# Altium PCB PCB1.PcbDoc
Units mm, origin at the board's own origin, x right, y up, seen from the top; angles counter-clockwise.
Board outline 44 x 44 mm, 2 copper layers (Top Layer, Bottom Layer); 46 components, 92 nets, 214 pads, 0 vias.
Unrouted connection lines stored in the file: 102.
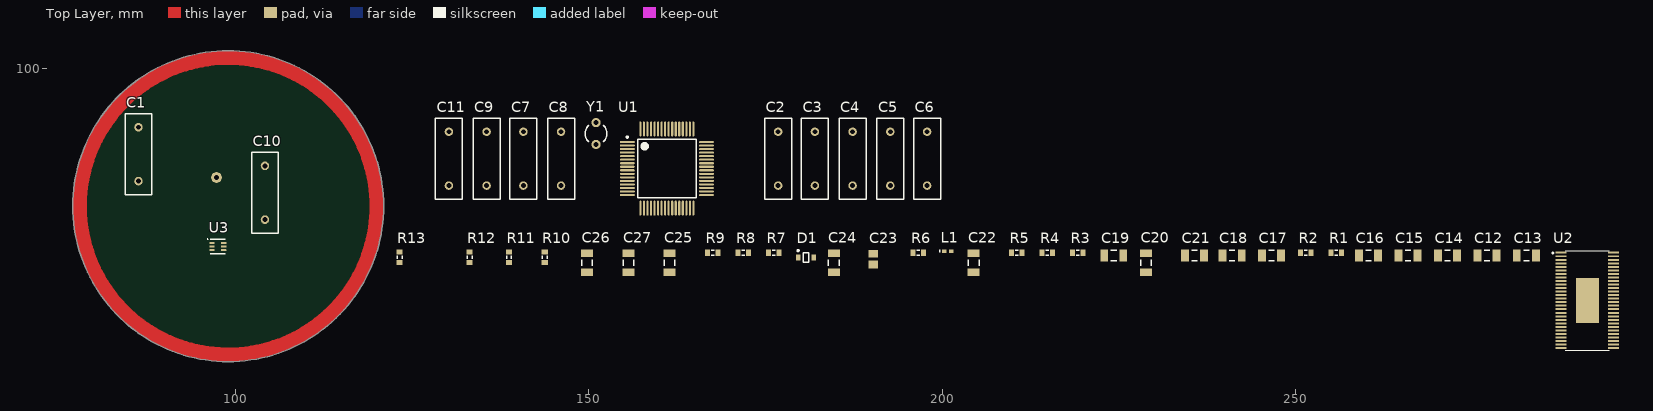
[diagram p0: Top Layer view]
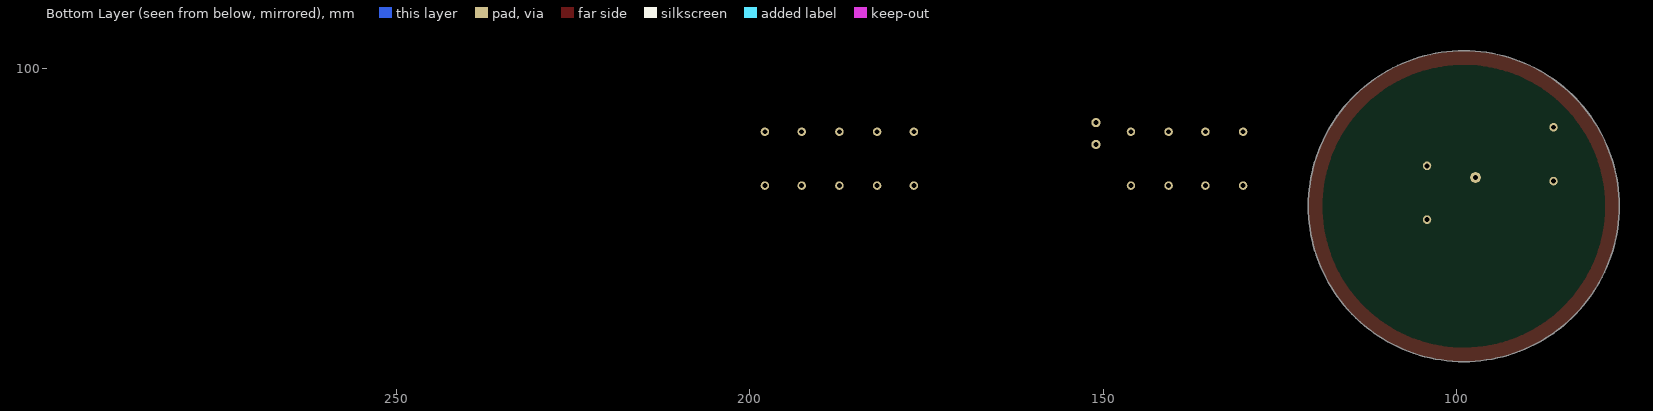
[diagram p1: Bottom Layer view, seen from below]

## Layer stack, top to bottom
Top Solder: solder mask 0.0102, Solder Resist, Dk 3.5
Top Layer: signal copper 0.0356
Dielectric 1: dielectric 0.32, FR-4, Dk 4.8
Bottom Layer: signal copper 0.0356
Bottom Solder: solder mask 0.0102, Solder Resist, Dk 3.5

## Board outline
76.933,80.518 ccw(c98.933,80.518) 98.933,58.518 ccw(c98.933,80.518) 120.933,80.518 ccw(c98.933,80.518) 98.933,102.518 ccw(c98.933,80.518)

## Design rules (kind name [scope] priority, off if disabled: settings)
Clearance [All] p1: gap=0.254 ignorepadtopadclearanceinfootprint=FALSE except(0: Arc-Hole Track-Hole SMDPad-Hole THPad-Hole Via-Hole Fill-Hole Poly-Hole Region-Hole Text-Hole)
PolygonConnect [All] p1: connectstyle=Relief reliefconductorwidth=0.254 reliefentries=4 polygonreliefangle="90 Angle" airgapwidth=0.254
RoomDefinition U_MCU [InComponentClass('U_MCU')] p1: confinementstyle=ConfineIn formatcopy=TRUE lockcomponents=FALSE outline 122.428,78.486 200.025,78.486 200.025,95.885 122.428,95.885
RoomDefinition U_DRV8301 [InComponentClass('U_DRV8301')] p2: confinementstyle=ConfineIn formatcopy=TRUE lockcomponents=FALSE outline 122.428,59.69 296.291,59.69 296.291,77.343 122.428,77.343
RoutingVias [All] p1: holewidth=0.711 width=1.27 viastyle="Through Hole" minholewidth=0.711 minwidth=1.27 maxholewidth=0.711 maxwidth=1.27
SolderMaskExpansion [All] p1: expansion=0.102 istentingtop=FALSE
Width [All] p1: maxlimit=0.254 minlimit=0.254 preferedwidth=0.254
30 further rules are at their usual default settings.

## Classes and differential pairs
component class U_MCU: C1 C2 C3 C4 C5 C6 C7 C8 C9 C10 C11 U1 Y1
component class U_DRV8301: C12 C13 C14 C15 C16 C17 C18 C19 C20 C21 C22 C23 C24 C25 C26 C27 D1 L1 R1 R2 R3 R4 R5 R6 R7 R8 R9 R10 R11 R12 R13 U2 U3

## Components (designator, comment, footprint, x,y, rotation, side; value= is the part's Value field where it differs from the comment)
C1 "Cap" RAD-0.3 86.233,87.884 r90 top value=2.2uF
C2 "Cap" RAD-0.3 176.784,87.249 r90 top value=2.2uF
C3 "Cap" RAD-0.3 181.991,87.249 r90 top value=2.2uF
C4 "Cap" RAD-0.3 187.325,87.249 r90 top value=2.2uF
C5 "Cap" RAD-0.3 192.659,87.249 r90 top value=2.2uF
C6 "Cap" RAD-0.3 197.866,87.249 r90 top value=2.2uF
C7 "Cap" RAD-0.3 140.716,87.249 r90 top value=15pF
C8 "Cap" RAD-0.3 146.05,87.249 r90 top value=15pF
C9 "Cap" RAD-0.3 135.509,87.249 r90 top value=100nF
C10 "Cap" RAD-0.3 104.14,82.423 r90 top value=2.2uF
C11 "Cap" RAD-0.3 130.175,87.249 r90 top value=2.2uF
C12 "Cap Semi" C1206 277.114,73.533 r0 top value=2.2uF
C13 "Cap Semi" C1206 282.702,73.533 r0 top value=2.2uF
C14 "Cap Semi" C1206 271.526,73.533 r0 top value=2.2uF
C15 "Cap Semi" C1206 265.938,73.533 r0 top value=2.2uF
C16 "Cap Semi" C1206 260.35,73.533 r0 top value=6.8nF
C17 "Cap Semi" C1206 246.634,73.533 r0 top value=22nF
C18 "Cap Semi" C1206 241.046,73.533 r0 top value=120pF
C19 "Cap Semi" C1206 224.282,73.533 r0 top value=220nF
C20 "Cap Semi" C1206 228.854,72.517 r90 top value=220nF
C21 "Cap Semi" C1206 235.712,73.533 r0 top value=220nF
C22 "Cap Semi" C1206 204.47,72.517 r90 top value=100nF
C23 "Cap Pol3" C0805 190.246,73.025 r90 top value=100uF
C24 "Cap Semi" C1206 184.658,72.517 r90 top value=2.2uF
C25 "Cap Semi" C1206 161.417,72.517 r90 top value=15nF
C26 "Cap Semi" C1206 149.733,72.517 r90 top value=4.7uF_100V
C27 "Cap Semi" C1206 155.575,72.517 r90 top value=4.7uF_100V
D1 "BAT54HT1G" ONSC-SOD-323-2-477-02_V 180.721,73.279 r0 top
L1 "Inductor" 0402-A 200.787,74.168 r0 top value=22u
R1 "Res3" J1-0603 255.778,73.914 r0 top value=3.3k
R2 "Res3" J1-0603 251.46,73.914 r0 top value=220k
R3 "Res3" J1-0603 219.202,73.914 r0 top value=15k
R4 "Res3" J1-0603 214.884,73.914 r0 top value=18k
R5 "Res3" J1-0603 210.566,73.914 r0 top value=10k
R6 "Res3" J1-0603 196.596,73.914 r0 top value=39k
R7 "Res3" J1-0603 176.149,73.914 r0 top value=2k2
R8 "Res3" J1-0603 171.831,73.914 r0 top value=39k
R9 "Res3" J1-0603 167.513,73.914 r0 top value=2k2
R10 "Res3" J1-0603 143.764,73.279 r90 top value=39k
R11 "Res3" J1-0603 138.684,73.279 r90 top value=2k2
R12 "Res3" J1-0603 133.096,73.279 r90 top value=39k
R13 "Res3" J1-0603 123.19,73.279 r90 top value=2k2
U1 "STM32F405RGT6" STM-LQFP64_M 161.036,85.852 r0 top
U2 "DRV8301DCAR" *SOP50P810X120-57N 291.338,67.183 r0 top
U3 "LM3671LC-1.2/NOPB" NKH0006B_V 97.472,74.803 r0 top
Y1 "XTAL" R38 151.003,90.805 r0 top

## Footprints (in the part's own frame and the unit in brackets; to place one, negate y for a bottom-side part, rotate by r counter-clockwise, add the part's x,y. Pads: shape width x height; smd on the part's side, far side on the other; paste and mask are expansions set on the pad)
0402-A [mm] "Chip Inductor, Body 1.0x0.5mm, IPC High Density"
  rect 0.6x0.5 smd: 1(-0.5,0) 2(0.5,0)
  silkscreen extent -1.1,-0.15 -1.1,0.15, body extent -0.55,-0.3 0.55,0.3, height 0.55
*SOP50P810X120-57N [mm]
  rect 1.57x0.28 smd: 1(-3.72,6.75) 2(-3.72,6.25) 3(-3.72,5.75) 4(-3.72,5.25) 5(-3.72,4.75) 6(-3.72,4.25) 7(-3.72,3.75) 8(-3.72,3.25) 9(-3.72,2.75) 10(-3.72,2.25) 11(-3.72,1.75) 12(-3.72,1.25) 13(-3.72,0.75) 14(-3.72,0.25) 15(-3.72,-0.25) 16(-3.72,-0.75) 17(-3.72,-1.25) 18(-3.72,-1.75) 19(-3.72,-2.25) 20(-3.72,-2.75) 21(-3.72,-3.25) 22(-3.72,-3.75) 23(-3.72,-4.25) 24(-3.72,-4.75) 25(-3.72,-5.25) 26(-3.72,-5.75) 27(-3.72,-6.25) 28(-3.72,-6.75) 29(3.72,-6.75) 30(3.72,-6.25) 31(3.72,-5.75) 32(3.72,-5.25) 33(3.72,-4.75) 34(3.72,-4.25) 35(3.72,-3.75) 36(3.72,-3.25) 37(3.72,-2.75) 38(3.72,-2.25) 39(3.72,-1.75) 40(3.72,-1.25) 41(3.72,-0.75) 42(3.72,-0.25) 43(3.72,0.25) 44(3.72,0.75) 45(3.72,1.25) 46(3.72,1.75) 47(3.72,2.25) 48(3.72,2.75) 49(3.72,3.25) 50(3.72,3.75) 51(3.72,4.25) 52(3.72,4.75) 53(3.72,5.25) 54(3.72,5.75) 55(3.72,6.25) 56(3.72,6.75)
  rect 3.235x6.35 smd: 57(0,0)
  silkscreen extent -4.99,-7.05 3.1,7.05
C0805 [mm] "Chip Capacitor, Body 2.0x1.3mm, IPC High Density"
  rect 1.1x1.4 smd: 1(-0.75,0) 2(0.75,0)
  body extent -1.1,-0.72 1.1,0.72, height 1.4
C1206 [mm] "Chip Capacitor, Body 3.2x1.6mm, IPC High Density"
  rect 1.1x1.7 smd: 1(-1.35,0) 2(1.35,0)
  silkscreen extent -0.4,-0.75 0.4,0.75, body extent -1.7,-0.9 1.7,0.9, height 1.3
J1-0603 [mm] "Chip Resistor, Body 1.6x0.8mm, IPC High Density"
  rect 0.7x0.9 smd: 1(-0.75,0) 2(0.75,0)
  silkscreen extent -0.2,-0.35 0.2,0.35, body extent -0.85,-0.48 0.85,0.48, height 0.9
NKH0006B_V [mm] "SON, 6-Leads, Body 2x2mm, Pitch 0.5mm, TI Recommend"
  rrect40% 0.75x0.25 smd: 1(-0.825,0.5) 2(-0.825,0) 3(-0.825,-0.5) 4(0.825,-0.5) 5(0.825,0) 6(0.825,0.5)
  silkscreen extent -1.5,-1.05 1.05,1.1, body extent -1,-1 1,1, height 0.59
ONSC-SOD-323-2-477-02_V [mm] "SOD, 2-Leads, Body 1.7x1.25mm"
  rect 0.63x0.83 smd: 1(-1.115,0) 2(1.115,0)
  silkscreen extent -1.24,-0.67 0.4,1.09, body extent -0.85,-0.63 0.85,0.63, height 1.06
R38 [mm] "Crystal, Thru-Hole; 2 Leads; Body 3.1 x 8.2 mm (Dia.xH)"
  round 1.3 hole 0.7: 1(0,1.55) 2(0,-1.55)
  silkscreen extent -1.55,-1.19 1.55,1.17
RAD-0.3 [mm] "Radial Cap, Thru-Hole; 2 Leads; 0.3 in Pin Spacing"
  round 1.2 hole 0.7: 1(-3.81,0) 2(3.81,0)
  silkscreen extent -5.71,-1.91 5.71,1.91
STM-LQFP64_M [mm] "Thin QFP, 64-Leads, Body 10x10mm, Pitch 0.5mm, IPC Low Density"
  oval 2.1x0.3 smd: 1(-5.6,3.75) 2(-5.6,3.25) 3(-5.6,2.75) 4(-5.6,2.25) 5(-5.6,1.75) 6(-5.6,1.25) 7(-5.6,0.75) 8(-5.6,0.25) 9(-5.6,-0.25) 10(-5.6,-0.75) 11(-5.6,-1.25) 12(-5.6,-1.75) 13(-5.6,-2.25) 14(-5.6,-2.75) 15(-5.6,-3.25) 16(-5.6,-3.75) 33(5.6,-3.75) 34(5.6,-3.25) 35(5.6,-2.75) 36(5.6,-2.25) 37(5.6,-1.75) 38(5.6,-1.25) 39(5.6,-0.75) 40(5.6,-0.25) 41(5.6,0.25) 42(5.6,0.75) 43(5.6,1.25) 44(5.6,1.75) 45(5.6,2.25) 46(5.6,2.75) 47(5.6,3.25) 48(5.6,3.75)
  oval 0.3x2.1 smd: 17(-3.75,-5.6) 18(-3.25,-5.6) 19(-2.75,-5.6) 20(-2.25,-5.6) 21(-1.75,-5.6) 22(-1.25,-5.6) 23(-0.75,-5.6) 24(-0.25,-5.6) 25(0.25,-5.6) 26(0.75,-5.6) 27(1.25,-5.6) 28(1.75,-5.6) 29(2.25,-5.6) 30(2.75,-5.6) 31(3.25,-5.6) 32(3.75,-5.6) 49(3.75,5.6) 50(3.25,5.6) 51(2.75,5.6) 52(2.25,5.6) 53(1.75,5.6) 54(1.25,5.6) 55(0.75,5.6) 56(0.25,5.6) 57(-0.25,5.6) 58(-0.75,5.6) 59(-1.25,5.6) 60(-1.75,5.6) 61(-2.25,5.6) 62(-2.75,5.6) 63(-3.25,5.6) 64(-3.75,5.6)
  silkscreen extent -5.72,-4.15 4.15,4.57, body extent -5,-5 5,5, height 1.6

## Part data
C1 C2 C3 C4 C5 C6 C7 C8 C9 C10 C11: "Capacitor", LatestRevisionDate=17-Jul-2002, LatestRevisionNote="Re-released for DXP Platform.", PackageDescription="Radial Cap, Thru-Hole; 2 Leads; 0.3 in Pin Spacing", PackageReference=RAD-0.3, Published=8-Jun-2000, Publisher="Altium Limited"
C12 C13 C14 C15 C16 C17 C18 C19 C20 C21 C22 C24 C25 C26 C27: "Capacitor (Semiconductor SIM Model)", LatestRevisionDate=29-May-2009, LatestRevisionNote="IPC-7351 Footprint Added.", PackageDescription="Chip Capacitor", PackageReference=C1206, Published=8-Jun-2000, Publisher="Altium Limited"
C23: "Polarized Capacitor (Surface Mount)", LatestRevisionDate=29-May-2009, LatestRevisionNote="IPC-7351 Footprint Added.", PackageDescription="Chip Capacitor", PackageReference=C0805, Published=8-Jun-2000, Publisher="Altium Limited"
D1: library part CMP-1055-00462-1, "Schottky Barrier Diode, 2-Pin SOD-323, Pb-Free, Tape and Reel", Manufacturer="On Semiconductor", ComponentLink1Description="Manufacturer URL", ComponentLink1URL=http://www.onsemi.com/, ComponentLink2Description=Datasheet, ComponentLink2URL=http://www.onsemi.cn/pub_link/Collateral/BAT54HT1-D.PDF, ComponentLink3Description="Package Specification", ComponentLink3URL=http://www.onsemi.com/pub_link/Collateral/477-02.PDF.1, Configuration=Single, DatasheetVersion="Rev. 6", IFSM Max (A)=0.6, Mounting Technology="Surface Mount", PackageDescription="2-Pin SOD, Body 1.7 x 1.25 mm", PackageReference=SOD-323-2-477-02, PackageVersion="Rev. H, 03/2007", Packing="Tape and Reel", PartNumber=BAT54HT1G, RoHS=TRUE, trr Max (ns)=5
R1 R2 R3 R4 R5 R6 R7 R8 R9 R10 R11 R12 R13: "Resistor", LatestRevisionDate=29-May-2009, LatestRevisionNote="IPC-7351 Footprint Added.", PackageDescription="Chip Resistor", PackageReference=J1-0603, Published=8-Jun-2000, Publisher="Altium Limited"
U1: library part CMP-0243-00019-3, "ARM Cortex-M4 32-bit MCU+FPU, 210 DMIPS, 1024 kB Flash, 192 kB Internal RAM, 51 I/Os, 64-pin LQFP, -40 to 85 degC, Tray", I/Os (High Current)=51, Manufacturer=STMicroelectronics, Operating Frequency(F) (Processor speed) (MHz)=168, Supply Voltage(Vcc) max (V)=3.6, Supply Voltage(Vcc) min (V)=1.8, ComponentLink1Description="Manufacturer URL", ComponentLink1URL=http://www.st.com/web/en/home.html, ComponentLink2Description=Datasheet, ComponentLink2URL=http://www.st.com/st-web-ui/static/active/en/resource/technical/document/datasheet/DM00037051.pdf, ComponentLink3Description="Package Specification", ComponentLink3URL=http://www.st.com/st-web-ui/static/active/en/resource/technical/document/datasheet/DM00037051.pdf, Core="ARM Cortex-M4", D/A Converter=2x12-bit, DatasheetVersion="Rev. 4", FLASH Size (Prog) (kB)=1024, Internal RAM Size (kB)=192, Mounting Technology="Surface Mount", PackageDescription="64-Pin Low Profile Quad Flat Package, 10 x 10 mm Body, 0.5 mm Pitch", PackageReference=LQFP64, PackageVersion="Rev. 4, 06/2013", Packing=Tray, PartNumber=STM32F405RGT6
U2: "Motor Driver Power MOSFET SPI 56-HTSSOP", Package="HTSSOP-56 Texas Instruments", Supplier Part Number 1=296-33274-5-ND, Availability=Unavailable, MF="Texas Instruments", MP=DRV8301DCAR, Price=None, SnapEDA_Link=https://www.snapeda.com/parts/DRV8301DCAR/Texas%20Instruments/view-part/46687/?ref=snap, Supplier 1=Digi-Key
U3: library part CMP-0063-00712-3, "2MHz, 600mA Step-Down DC-DC Converter, 6-pin LLP COL, Pb-Free", Manufacturer="Texas Instruments", PackageTopMarking=XTT*S39, PowerWise=N, ComponentLink1Description="Datasheet URL", ComponentLink1URL=http://www.ti.com/general/docs/lit/getliterature.tsp?genericPartNumber=LM3671&fileType=pdf, CompType=MiscPower, PackageDescription="LLP, 2 x 2 x 0.6mm, 6 Lead, 0.5mm Pitch, No Pullback", PackageReference=NKH0006B, PinCount=6, RoHS=Y
Y1: "Crystal Oscillator", LatestRevisionDate=17-Jul-2002, LatestRevisionNote="Re-released for DXP Platform.", PackageDescription="Crystal, Thru-Hole; 2 Leads; Body 3.1 x 8.2 mm (Dia.xH)", PackageReference=R38, Published=8-Jun-2000, Publisher="Altium Limited"
L1: Code_IEC=1005, Code_JEITA=0402, LatestRevisionDate=29-May-2009, LatestRevisionNote="IPC-7351 Footprint Added.", PackageDescription="Chip Inductor", PackageReference=0402-A, Published=8-Jun-2000, Publisher="Altium Limited"

## Free pads (board coordinates)
  round 1.524 hole 0.762: 1(97.282,84.582)

## Nets (pads, with @x,y where several pads share a name; then routed paths per layer and width w, separated by ;. In a path a pad name is that pad's centre, name@x,y a point inside that pad or via, vN(x,y) a via of type N, cw(c..) or ccw(c..) an arc to the next point about the centre after c; other vN are vias at no path point)
5V: C23.1 C24.2 L1.2 R4.1
ADC_15: U1.25
ADC_TEMP: U1.17
AN_IN: U1.11
CAN_RX: U1.61
CAN_TX: U1.62
CS: U2.8
CURRENT_1: U1.8
CURRENT_2: U1.9
CURRENT_3: U1.10
EN_GATE: U2.16
Fault: U2.6
GH_A: U2.47
GH_B: U2.42
GH_C: U2.37
GL_A: U2.45
GL_B: U2.40
GL_C: U2.35
GND: C1.1 C2.1 C3.1 C4.1 C5.1 C6.1 C7.1 C8.1 C9.1 C10.1 C11.1 C12.2 C13.2 C14.2 C15.2 C16.2 C18.2 C23.2 C24.1 C25.2 C26.1 C27.1 D1.2 R1.2 R2.2 R5.1 R7.2 R9.2 R11.2 R13.2 U1.12 U1.18 U1.60 U1.63 U2.28 U2.30 U2.31 U2.32 U2.33 U2.57 | length 131.9
  Top Layer w2: 119.933,80.518 ccw(c98.933,80.518) 119.933,80.518
H1: U1.41
H2: U1.42
H3: U1.43
HALL_1: U1.37
HALL_2: U1.38
HALL_3: U1.39
INH_A: U2.17
INH_B: U2.19
INH_C: U2.21
INL_B: U2.20
INL_C: U2.22
L1: U1.34
L2: U1.35
L3: U1.36
LED_GREEN: U1.26
LED_RED: U1.27
MISO_ADC_EXT2: U1.22
NetC7_2: C7.2 U1.6 Y1.1
NetC8_2: C8.2 U1.5 Y1.2
NetC10_2: C10.2 U1.47
NetC11_2: C11.2 U1.31
NetC12_1: C12.1 C13.1 C14.1 U2.13 U2.24 U2.27
NetC15_1: C15.1 U2.23
NetC16_1: C16.1 R3.2
NetC17_1: C17.1 U2.14
NetC17_2: C17.2 U2.15
NetC18_1: C18.1 R3.1 U2.2
NetC19_1: C19.1 U2.38
NetC20_1: C20.1 U2.43
NetC21_1: C21.1 U2.48
NetC22_1: C22.1 D1.1 L1.1 U2.50 U2.51
NetC22_2: C22.2 U2.52
NetC25_1: C25.1 U2.56
NetR1_1: R1.1 R4.2 U2.3
NetR2_1: R2.1 U2.1
NetR5_2: R5.2 U2.7
NetU1_44: U1.44
NetU1_45: U1.45
NRST: C9.2 U1.7
PB3: U1.55
PB4: U1.56
PB5: U1.57
PB12: U1.33
PD2: U1.54
RX_SDA_NSS: U1.20 U1.30
SCK_ADC_EXT: U1.21
SCLK: U2.11
SDI: U2.9
SDO: U2.10
SENSE_A: R8.1 R9.1
SENSE_B: R10.1 R11.1
SENSE_C: R12.1 R13.1
SENSE_SUPPLY: R6.1 R7.1
SERVO: U1.58
SH_A: C21.2 R8.2
SH_B: C20.2 R10.2 U2.41
SH_C: C19.2 R12.2 U2.36
SL_A: U2.44
SL_B: U2.39
SL_C: U2.34
SPI3_CS: U1.40
SPI3_MISO: U1.52
SPI3_MOSI: U1.53
SPI3_SCK: U1.51
SUPPLY: C26.2 C27.2 R6.2 U2.29 U2.53 U2.54
SWCLK: U1.49
SWDIO: U1.46
TEMP_MOTOR: U1.24
TX_SCL_MOSI: U1.23 U1.29
VCC: C1.2 C2.2 C3.2 C4.2 C5.2 C6.2 U1.1 U1.13 U1.19 U1.32 U1.48 U1.64 U2.49
VOLTAGE_1: U1.14
VOLTAGE_2: U1.15
VOLTAGE_3: U1.16
pads on no net: U1.2 U1.3 U1.4 U1.28 U1.50 U1.59 U2.4 U2.5 U2.12 U2.18 U2.25 U2.26 U2.46 U2.55 U3.1 U3.2 U3.3 U3.4 U3.5 U3.6

## Polygon pours and split planes (outlines as drawn)
no net on Top Layer "NONET_L01_P000" (solid, pour order 0): 81.153,87.503

## Other copper
Top Layer:
  region: 94.996,86.36

## Silkscreen, mask and mechanical layers (free items; w line width, h text height)
Top Solder:
  circle w2: c98.933,80.518 r21
Mechanical 1:
  circle w0.254: c98.933,80.518 r22